# Altium PCB PCB1.PcbDoc
Units mm, origin at the board's own origin, x right, y up, seen from the top; angles counter-clockwise.
Board outline 70 x 70 mm, 2 copper layers (Top Layer, Bottom Layer); 21 components, 15 nets, 76 pads, 18 vias.
Unrouted connection lines stored in the file: 7.
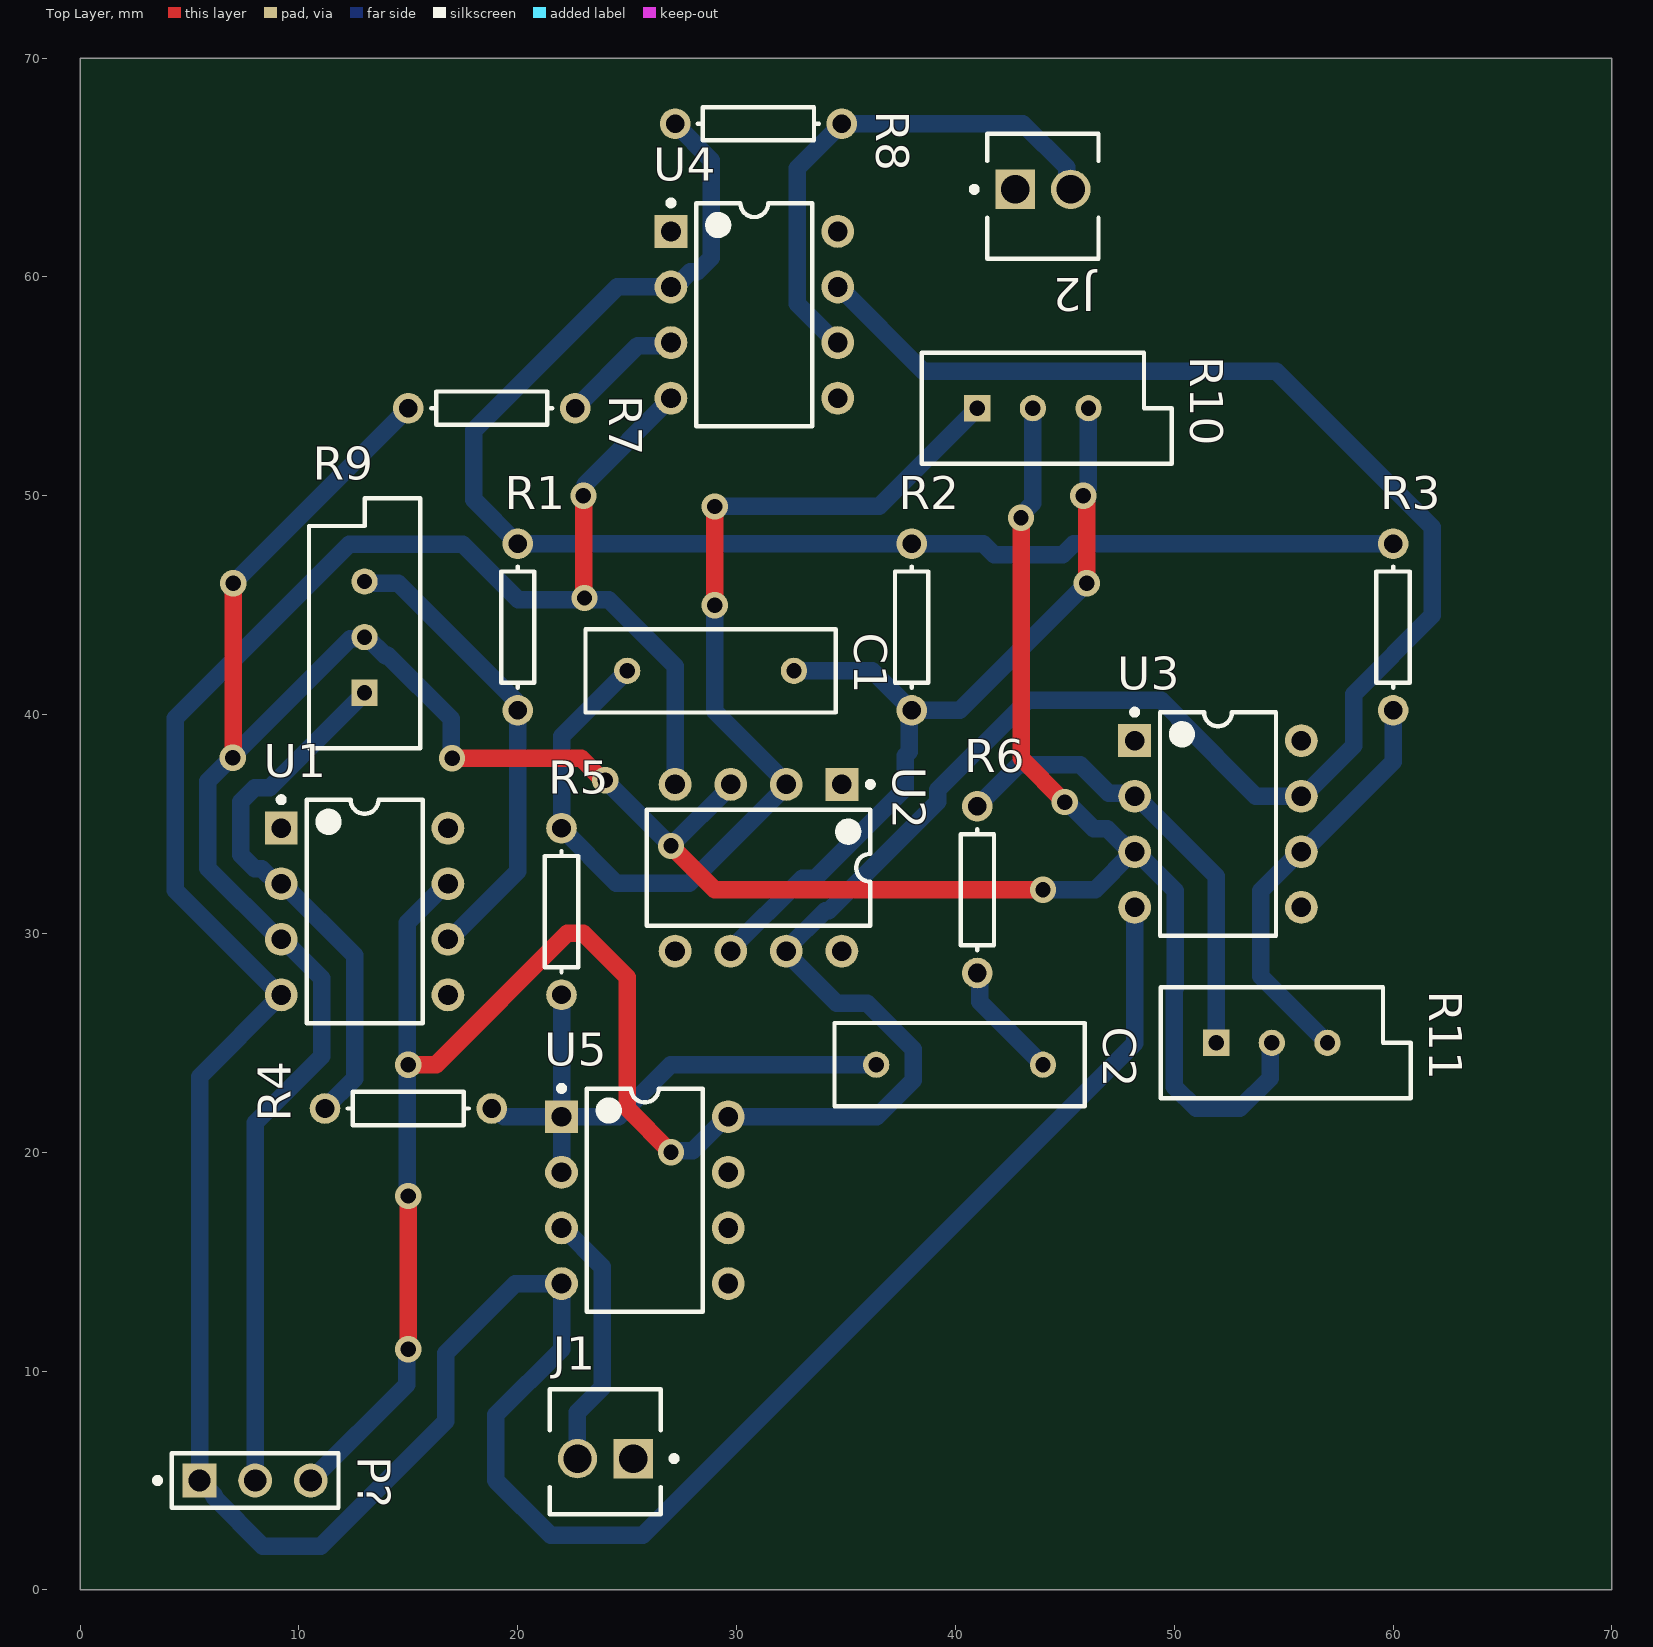
[diagram p0: Top Layer view]
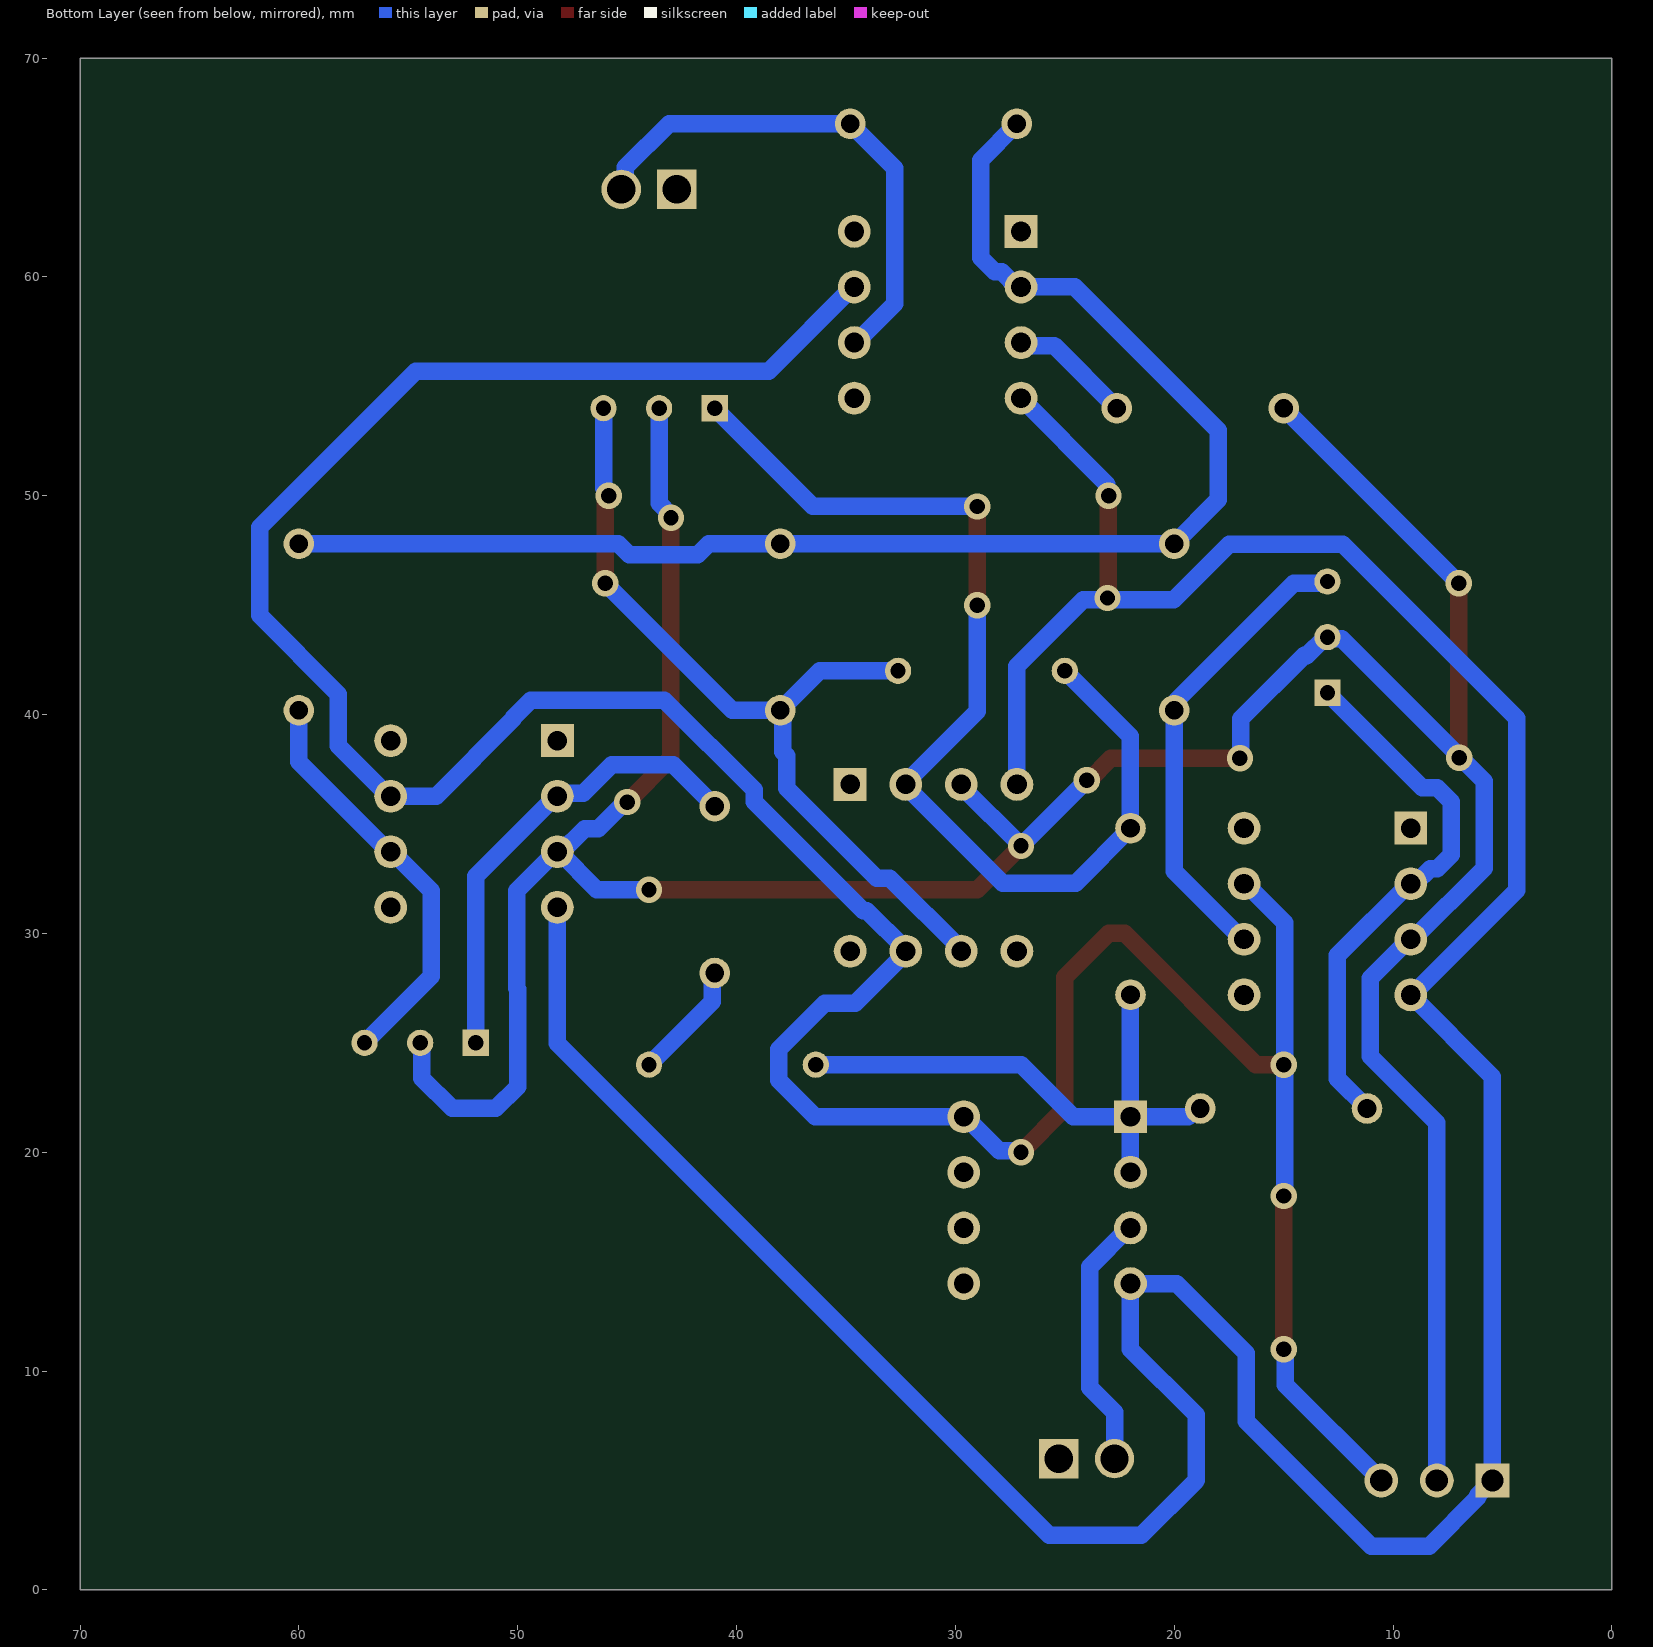
[diagram p1: Bottom Layer view, seen from below]

## Layer stack, top to bottom
Top Solder: solder mask 0.0102, Solder Resist, Dk 3.5
Top Layer: signal copper 0.0356
Dielectric 1: dielectric 0.32, FR-4, Dk 4.8
Bottom Layer: signal copper 0.0356
Bottom Solder: solder mask 0.0102, Solder Resist, Dk 3.5

## Board outline
0,0 70,0 70,70 0,70

## Design rules (kind name [scope] priority, off if disabled: settings)
Clearance [All] p1: gap=0.7 ignorepadtopadclearanceinfootprint=FALSE
PolygonConnect [All] p1: connectstyle=Relief reliefconductorwidth=0.254 reliefentries=4 polygonreliefangle="90 Angle" airgapwidth=0.254
RoutingVias [All] p1: holewidth=0.7 width=1.2 viastyle="Through Hole" minholewidth=0.7 minwidth=1.2 maxholewidth=0.7 maxwidth=1.2
SolderMaskExpansion [All] p1: expansion=0.102 istentingtop=FALSE
Width [All] p1: maxlimit=1.2 minlimit=0.8 preferedwidth=1 minimp=50.000000 maximp=50.000000 favimp=50.000000
30 further rules are at their usual default settings.

## Components (designator, comment, footprint, x,y, rotation, side; value= is the part's Value field where it differs from the comment)
C1 "Cap" RAD-0.3 28.81,42 r0 top value=100pF
C2 "Cap" RAD-0.3 40.19,24 r0 top value=100pF
J1 "640456-2" TECO-640456-2_V 24,6 r0 top
J2 "640456-2" TECO-640456-2_V 44,64 r180 top
P? "22-28-4033" MOLX-22-28-4033_V 8,5 r0 top
R1 "Res1" AXIAL-0.3 20,44 r90 top value=1K
R2 "Res1" AXIAL-0.3 38,44 r90 top value=100K
R3 "Res1" AXIAL-0.3 60,44 r90 top value=100K
R4 "Res1" AXIAL-0.3 15,22 r180 top value=1K
R5 "Res1" AXIAL-0.3 22,31 r90 top value=1K
R6 "Res1" AXIAL-0.3 41,32 r90 top value=1K
R7 "Res1" AXIAL-0.3 18.81,54 r0 top value=100K
R8 "Res1" AXIAL-0.3 31,67 r0 top value=100K
R9 "RPot" VR5 13,43.54 r90 top value=1K
R10 "RPot" VR5 43.54,54 r0 top value=1K
R11 "RPot" VR5 54.46,25 r0 top value=1K
U1 "LM741CN/NOPB" P0008A 13,31 r0 top
U2 "LM741CN/NOPB" P0008A 31,33 r270 top
U3 "LM741CN/NOPB" P0008A 52,35 r0 top
U4 "LM741CN/NOPB" P0008A 30.81,58.27 r0 top
U5 "NE5532P" P0008A 25.81,17.81 r0 top

## Footprints (in the part's own frame and the unit in brackets; to place one, negate y for a bottom-side part, rotate by r counter-clockwise, add the part's x,y. Pads: shape width x height; smd on the part's side, far side on the other; paste and mask are expansions set on the pad)
AXIAL-0.3 [mm] "Axial Device, Thru-Hole; 2 Leads; 0.3 in Pin Spacing"
  round 1.4 hole 0.85: 1(-3.81,0) 2(3.81,0)
  silkscreen extent -2.77,-0.76 2.77,0.76
MOLX-22-28-4033_V [mm] "THD, 3-Leads, Body 7.62x2.49mm, Pitch 2.54mm"
  rect 1.55x1.55 hole 1.02: 1(-2.54,0)
  round 1.55 hole 1.02: 2(0,0) 3(2.54,0)
  silkscreen extent -4.58,-1.24 3.81,1.24, body extent -3.81,-1.24 3.81,1.24, height 8.38
P0008A [mm] "DIP, 8-Leads, Body 10.15x6.6mm, Pitch 2.54mm"
  rect 1.5x1.5 hole 0.9: 1(-3.81,3.81)
  round 1.5 hole 0.9: 2(-3.81,1.27) 3(-3.81,-1.27) 4(-3.81,-3.81) 5(3.81,-3.81) 6(3.81,-1.27) 7(3.81,1.27) 8(3.81,3.81)
  silkscreen extent -3.93,-5.1 2.65,5.23, body extent -3.95,-5.07 3.95,5.07, height 5.08
RAD-0.3 [mm] "Radial Cap, Thru-Hole; 2 Leads; 0.3 in Pin Spacing"
  round 1.2 hole 0.7: 1(-3.81,0) 2(3.81,0)
  silkscreen extent -5.72,-1.91 5.71,1.91
TECO-640456-2_V [mm] "HDR, 2-Leads, Body 5.715x5.08mm, Pitch 2.54mm"
  rect 1.8x1.8 hole 1.3: 1(1.27,0)
  round 1.8 hole 1.3: 2(-1.27,0)
  silkscreen extent -2.54,-2.54 3.26,3.17, body extent -2.54,-2.67 2.54,3.17, height 9.4
VR5 [mm] "Thru-Hole; 3 Leads"
  rect 1.2x1.2 hole 0.7: 1(-2.54,0)
  round 1.2 hole 0.7: 2(0,0) 3(2.54,0)
  silkscreen extent -5.08,-2.54 6.35,2.54

## Part data
C1 C2: "Capacitor", LatestRevisionDate=17-Jul-2002, LatestRevisionNote="Re-released for DXP Platform.", PackageDescription="Radial Cap, Thru-Hole; 2 Leads; 0.3 in Pin Spacing", PackageReference=RAD-0.3, Published=8-Jun-2000, Publisher="Altium Limited"
J1 J2: library part CMP-2000-05417-1, "Male Header, Pitch 2.54 mm, 1 x 2 Position, Height 10.49 mm, Tail Length 3.556 mm, -55 to 105 degC, RoHS, Bulk", Color=White, Current, Rating="5 /  / A", Flammability Rating=UL94V-0, Manufacturer="TE Connectivity", Temperature, Operating="-55to+105 /  / degC", Voltage, Rating="250 /  / V", Agency Approvals=CSA,UL, Angle=Straight, Brand/Series=MTA-100Series, Color, Housing=White, Connector Type=MTA-100, Contact Centerline Spacing="0.100 /  / in.", Contact Mating Area Plating=Tin, Contact Plating=Tin, Contact Shape=Square, Contact Termination Area Plating=Tin, Datasheet URL=https://datasheet.ciiva.com/11746/0900766b80eb7fdd-11746365.pdf, Datasheet Version="Rev. W, 06/2004", Length, Overall="0.2 /  / \"", Length, Pin="0.14 /  / \"", Length, Terminal Post="0.14 /  / in.", Manufacturer URL=http://www.te.com/, Material, Contact=CopperAlloy, Material, Housing=Polyester, Mount Angle=Vertical, Mounting Hole Size="0.04 /  / \"", Mounting Type=PCMount, Number of Contacts=2, Number of Positions=2, Number of Rows=1, Pin Spacing="0.1 /  / \"", Primary Type=InterconnectSystem, Size, Post="0.025 /  / in.", Special Features=Pinstrip, Standards=RoHSCompliant,ELVCompliant,UL94V-0, Termination=Solder, Type=PCBPlug
P?: library part CMP-1676-00001-5, "Male Header, Pitch 2.54 mm, 1 x 3 Position, Height 8.38 mm, Tail Length 3.18 mm, RoHS, Bulk", Colour=Black, Current Rating="4 A", Manufacturer=Molex, Max Operating Temperature="75 degC", Min Operating Temperature="0 degC", Package Quantity=1, Voltage Rating="250 V", ComponentLink1Description="Manufacturer URL", ComponentLink1URL=http://www.molex.com/, ComponentLink2Description=Datasheet, ComponentLink2URL=http://www.molex.com/pdm_docs/sd/022284033_sd.pdf, Contact Finish=Gold, Contact Material=Brass, Contact Plating=Gold, DatasheetVersion="Rev. G, 01/2012", Height="8.38 mm", Lead Pitch="0.1 inch", Length="7.62 mm", Mount="Through Hole", Mounting Technology="Through Hole", PackageDescription="Male Header, Pitch 2.54 mm, 1 x 3 Position, Height 8.38 mm, Tail Length 3.18 mm", PackageReference=22-28-4033, Packaging=Bulk, Pins=3, REACH SVHC=Unknown, RoHSCompliant=true, Rows=1
R1 R2 R3 R4 R5 R6 R7 R8: "Resistor", LatestRevisionDate=17-Jul-2002, LatestRevisionNote="Re-released for DXP Platform.", PackageDescription="Axial Device, Thru-Hole; 2 Leads; 0.3 in Pin Spacing", PackageReference=AXIAL-0.3, Published=8-Jun-2000, Publisher="Altium Limited"
R9 R10 R11: "Potentiometer", LatestRevisionDate=17-Jul-2002, LatestRevisionNote="Re-released for DXP Platform.", PackageDescription="Variable Resistor, Thru-Hole; 3 Leads", PackageReference=VR5, Published=8-Jun-2000, Publisher="Altium Limited", Set Position=0.5, Sim Note="Enter the Resistance value and the set point into parameter fields."
U1 U2 U3 U4: library part CMP-0055-00162-3, "Operational Amplifier, 8-pin MDIP, Pb-Free", Manufacturer="Texas Instruments", Package Reference=P0008A, PackageTopMarking=NSUZXYTTE#*LM*741CN, PowerWise=N, Code_JEDEC=MS-001-BA, ComponentLink1Description="Datasheet URL", ComponentLink1URL=http://www.ti.com/general/docs/lit/getliterature.tsp?genericPartNumber=LM741&fileType=pdf, CompType=Amplifiers, PackageDescription="MDIP, .365 x .250 x .130in, 8 Lead, .100in Pitch", PinCount=8, RoHS=Y
U5: library part CMP-0017-00910-2, "Dual Low-Noise High-Speed Audio Operational Amplifier, 10 to 30 V, 0 to 70 degC, 8-pin DIP (P8), Pb-Free (RoHS)", Manufacturer="Texas Instruments", Total Supply Voltage(Max)(+5V is 5, +/-5V is 10)=30, Total Supply Voltage(Min)(+5V is 5, +/-5V is 10)=10, CMRR(Min)(dB)=70, Code_JEDEC=MS-001, ComponentLink1Description="Manufacturer URL", ComponentLink1URL=http://www.ti.com/, ComponentLink2Description=Datasheet, ComponentLink2URL=http://www.ti.com/lit/ds/symlink/ne5532.pdf, ComponentLink3Description="Package Specification", ComponentLink3URL=http://www.ti.com/litv/pdf/mpdi001b, DatasheetVersion=SLOS075I, Eco-Plan="Pb-Free (RoHS)", GBW(Typ)(MHz)=10, IIB(Max)(pA)=800000, Iq per channel(Max)(mA)=4, Mounting Technology="Through Hole", Number of Channels=2, PackageDescription="8-Pin Plastic In-Line, Body 9.59 x 6.35 mm, Pitch 2.54 mm", PackageReference=P0008A, PackageVersion="4040082/E, 04/2010", PartNumber=NE5532P, Slew Rate(Typ)(V/us)=9, Sub Family="General Purpose Amplifier, High Supply Voltage Amplifier (>=30V), Low Noise Amp (<=10nV/rtHz)", Vio (25C)(Max)(mV)=4, Vn at 1kHz(Typ)(nV/rtHz)=5

## Via types
v1: diameter 1.2, hole 0.7, Top Layer to Bottom Layer, 18 vias

## Nets (pads, with @x,y where several pads share a name; then routed paths per layer and width w, separated by ;. In a path a pad name is that pad's centre, name@x,y a point inside that pad or via, vN(x,y) a via of type N, cw(c..) or ccw(c..) an arc to the next point about the centre after c; other vN are vias at no path point)
12V: P?.3 U1.7 U2.7 U3.7 U4.7 U5.8 | length 150.7
  Top Layer w0.8: v1(15,11) v1(15,18) ; v1(15,24) 16.264,24 22.264,30 23,30 25,28 25,22 v1(27,20)
  Bottom Layer w0.8: P?.3 14.923,9.383 14.923,10.923 v1(15,11) ; v1(15,18) 14.96,18.04 14.96,30.496 16.734,32.27 U1.7 ; v1(27,20) 27.077,20.077 28,20.077 29.544,21.62 U5.8 36.404,21.62 38.08,23.296 38.08,24.704 35.97,26.814 34.57,26.814 32.27,29.114 U2.7 32.27,29.266 34.044,31.04 34.217,31.04 39.2,36.023 39.2,36.556 43.304,40.66 49.396,40.66 50.198,39.858 50.198,39.802 53.73,36.27 U3.7 55.886,36.27 58.2,38.584 58.2,40.936 61.8,44.536 61.8,48.556 54.656,55.7 38.536,55.7 34.696,59.54 U4.7
-12V: P?.1 U1.4 U2.4 U3.4 U4.4 U5.4 | length 163.7
  Top Layer w0.8: v1(23,50) 23.023,49.977 23.023,45.35 v1(23.047,45.327)
  Bottom Layer w0.8: v1(23,50) 23.077,50.077 23.077,50.537 U4.4 ; U2.4 27.19,42.214 24.162,45.242 20.022,45.242 17.484,47.78 12.296,47.78 4.34,39.824 4.34,31.964 9.114,27.19 U1.4 5.46,23.46 P?.1 6.125,4.335 6.125,4.223 8.348,2 11,2 16.7,7.7 16.7,10.821 19.879,14 U5.4 22,11 19,8 19,5 21.5,2.5 25.72,2.5 48.19,24.97 U3.4
GND: P?.2 R7.1 R9.2 R10.2 R11.2 U1.3 U2.3 U3.3 | length 151.9
  Top Layer w0.8: v1(6.978,38.03) 6.989,38.041 6.989,45.989 v1(7,46) ; v1(17,38) 22.892,38 23.892,37 v1(24,37) ; v1(27,34) 29,32 v1(44,32) ; v1(43,49) 43,38 v1(45,36)
  Bottom Layer w0.8: v1(7,46) R7.1 ; P?.2 8,21.356 11.04,24.396 11.04,27.956 9.266,29.73 U1.3 9.093,29.73 5.84,32.983 5.84,36.961 12.342,43.463 12.923,43.463 R9.2 13.108,43.54 13.948,42.7 14.056,42.7 16.956,39.8 16.956,38.044 v1(17,38) ; v1(24,37) v1(27,34) 27,34.004 29.73,36.734 U2.3 ; v1(43,49) 43,49.108 43.54,49.648 R10.2 ; v1(44,32) 46.384,32 48.114,33.73 48.266,33.73 50.04,31.956 50.04,27.498 50,27.458 50,23 51,22 53,22 54.383,23.383 54.383,24.923 R11.2 ; v1(45,36) 45.108,36 46.316,34.792 46.938,34.792 U3.3@48.001,33.73
input: J1.2 U5.3 | length 11.8
  Bottom Layer w0.8: U5.3 22.076,16.54 23.85,14.766 23.85,9.235 22.73,8.115 J1.2
NetC1_1: C1.1 R5.2 R10.1 U2.2 | length 49.6
  Top Layer w0.8: v1(29,45) v1(29,49.51)
  Bottom Layer w0.8: C1.1 22,39 R5.2 24.51,32.3 27.836,32.3 32.27,36.734 U2.2 32.27,36.886 29,40.156 v1(29,45) ; v1(29,49.51) 36.51,49.51 R10.1
NetC1_2: C1.2 R2.1 R10.3 U2.6 | length 39.5
  Top Layer w0.8: v1(45.84,50) 45.84,49.892 46,49.732 v1(46,46)
  Bottom Layer w0.8: U2.6 29.73,29.266 32.994,32.531 33.586,32.531 37.7,36.644 37.7,38.128 37.885,38.313 37.885,40.075 R2.1 ; C1.2 36.19,42 R2.1 ; v1(45.84,50) 45.84,50.108 46.08,50.348 R10.3 ; v1(46,46) 40.19,40.19 R2.1
NetC2_1: C2.1 R4.1 R5.1 U5.1 U5.2 | length 26.8
  Bottom Layer w0.8: R4.1 18.972,22 19.352,21.62 U5.1 ; U5.2 U5.1 ; R5.1 U5.1 ; C2.1 27,24 24.62,21.62 U5.1
NetC2_2: C2.2 R6.1 | length 5.4
  Bottom Layer w0.8: R6.1 41.115,28.075 41.115,26.885 C2.2
NetJ2_2: J2.2 R8.2 U4.6 | length 23.8
  Bottom Layer w0.8: U4.6 34.544,57 32.77,58.774 32.77,64.96 R8.2 43.086,67 45.079,65.007 45.079,64.191 J2.2
NetR1_1: R1.1 R9.3 U1.6 | length 21.3
  Bottom Layer w0.8: R9.3 13.077,46.003 14.537,46.003 19.885,40.655 19.885,40.305 R1.1 ; U1.6 16.886,29.73 20,32.844 R1.1@20,40
NetR1_2: R1.2 R2.2 R3.2 R8.1 U4.2 | length 67.4
  Bottom Layer w0.8: R8.1 28.85,65.34 28.85,60.874 28.206,60.23 27.879,60.23 27.189,59.54 U4.2 24.54,59.54 18,53 18,49.81 R1.2 41.274,47.81 41.784,47.3 44.896,47.3 45.406,47.81 R3.2
NetR3_1: R3.1 R11.3 U3.6 | length 19
  Bottom Layer w0.8: R11.3 53.96,28.04 53.96,31.956 55.734,33.73 U3.6 55.886,33.73 60,37.844 R3.1
NetR4_2: R4.2 R9.1 U1.2 | length 24.8
  Bottom Layer w0.8: R4.2 12.54,23.35 12.54,28.996 9.266,32.27 U1.2 9.001,32.27 8.311,32.96 7.984,32.96 7.34,33.604 7.34,36.016 7.984,36.66 8.66,36.66 R9.1
NetR6_2: R6.2 R11.1 U3.2 | length 21.4
  Bottom Layer w0.8: R6.2 42.89,37.7 45.704,37.7 47,36.404 48.132,36.404 51.92,32.616 R11.1
NetR7_2: R7.2 U4.3 | length 5.6
  Bottom Layer w0.8: R7.2 25.486,56.866 26.866,56.866 U4.3
pads on no net: J1.1 J2.1 U1.1 U1.5 U1.8 U2.1 U2.5 U2.8 U3.1 U3.5 U3.8 U4.1 U4.5 U4.8 U5.5 U5.6 U5.7